# Altium PCB CSR8311_Core.PcbDoc
Units mil, origin at the board's own origin, x right, y up, seen from the top; angles counter-clockwise.
Board outline 1105 x 1105 mil, 2 copper layers (Top Layer, Bottom Layer), stack 50.044 mil thick; 31 components, 38 nets, 155 pads, 42 vias.
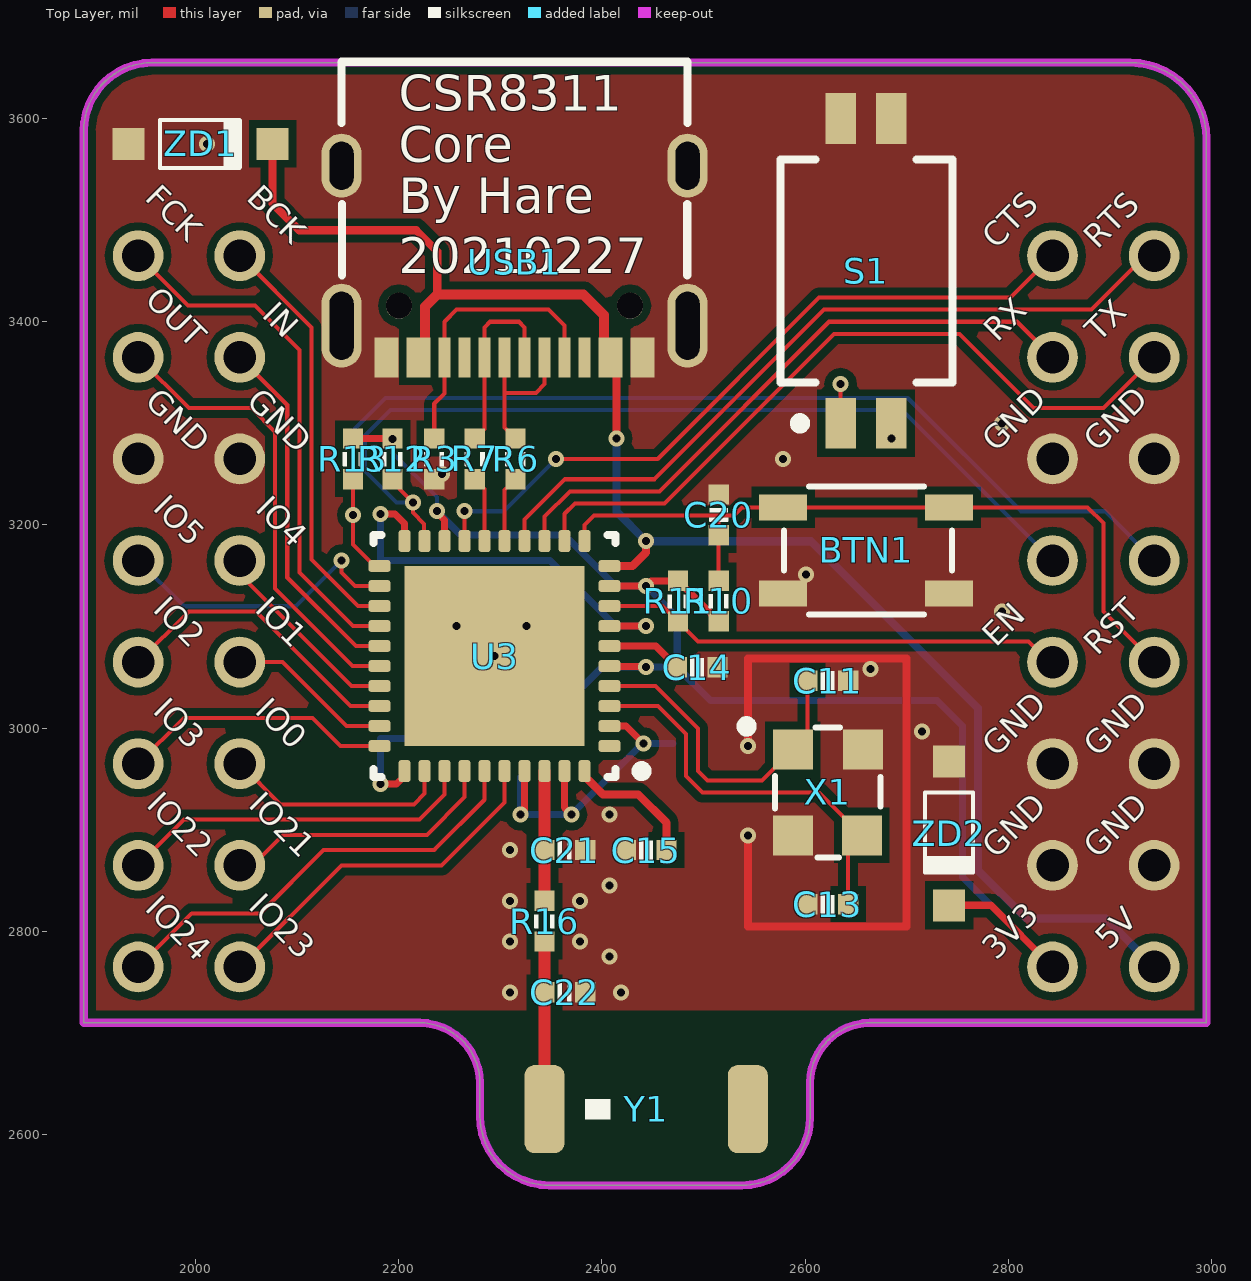
[diagram p0: Top Layer view]
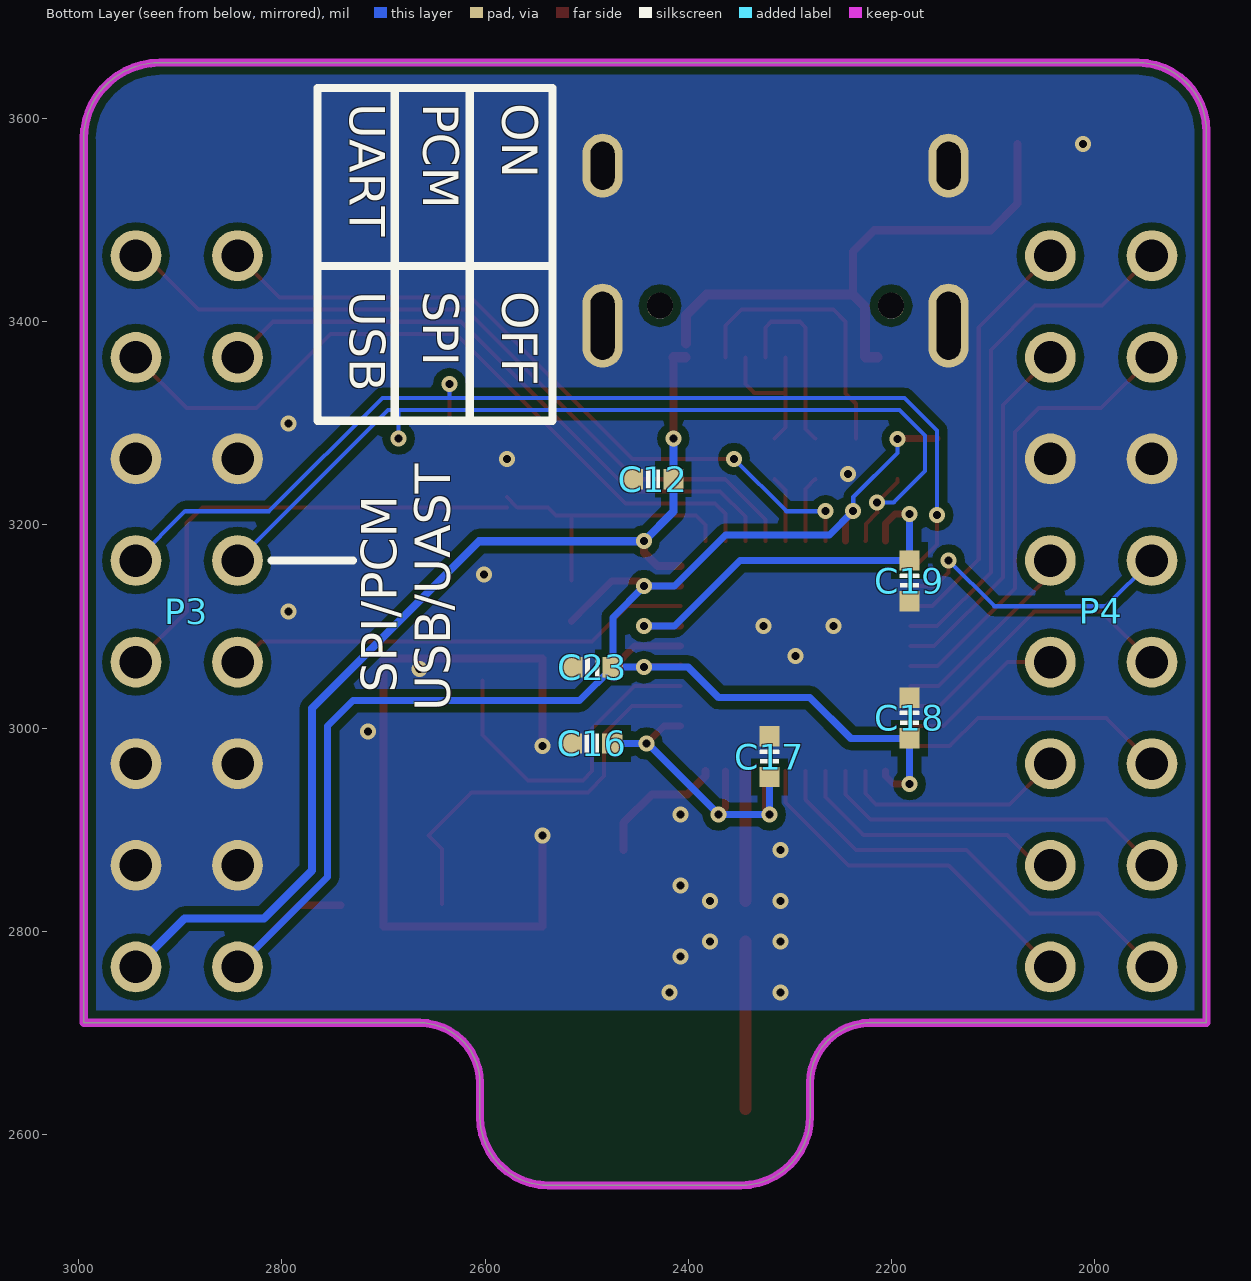
[diagram p1: Bottom Layer view, seen from below]
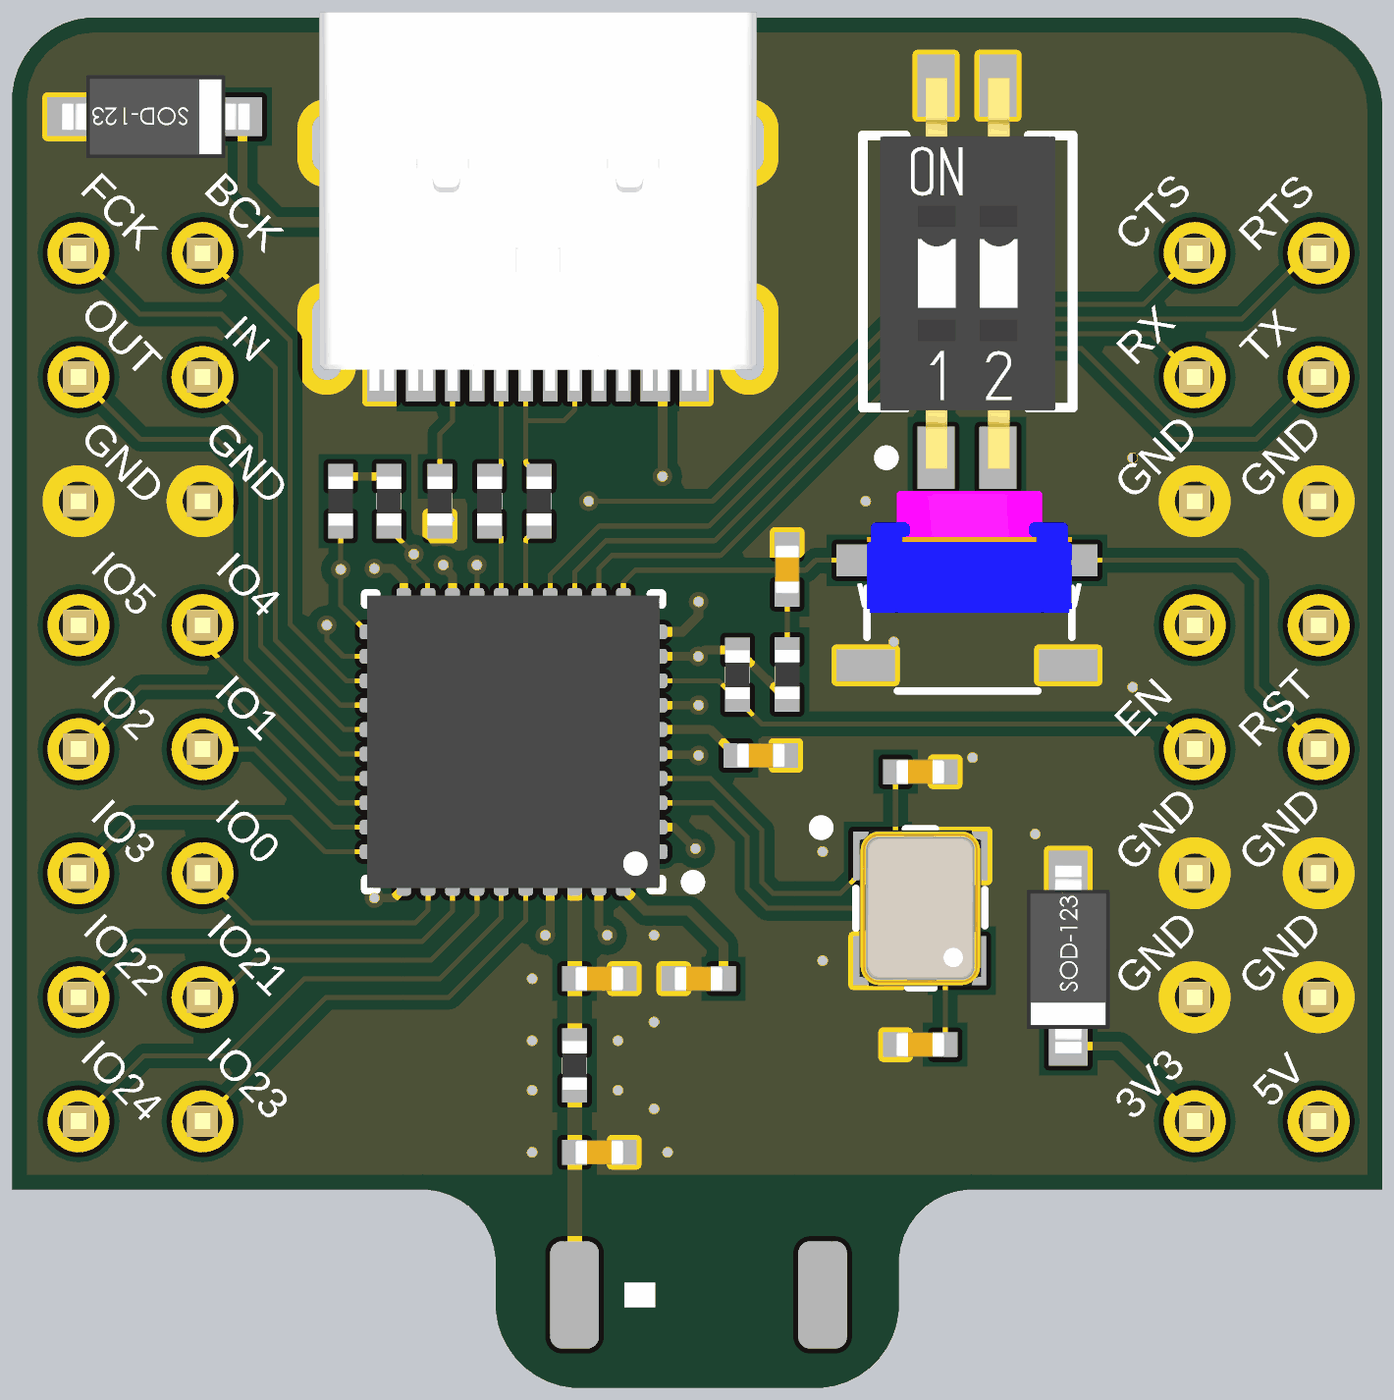
[diagram p2: 3D render of the assembled board from above, using the file's embedded part models]
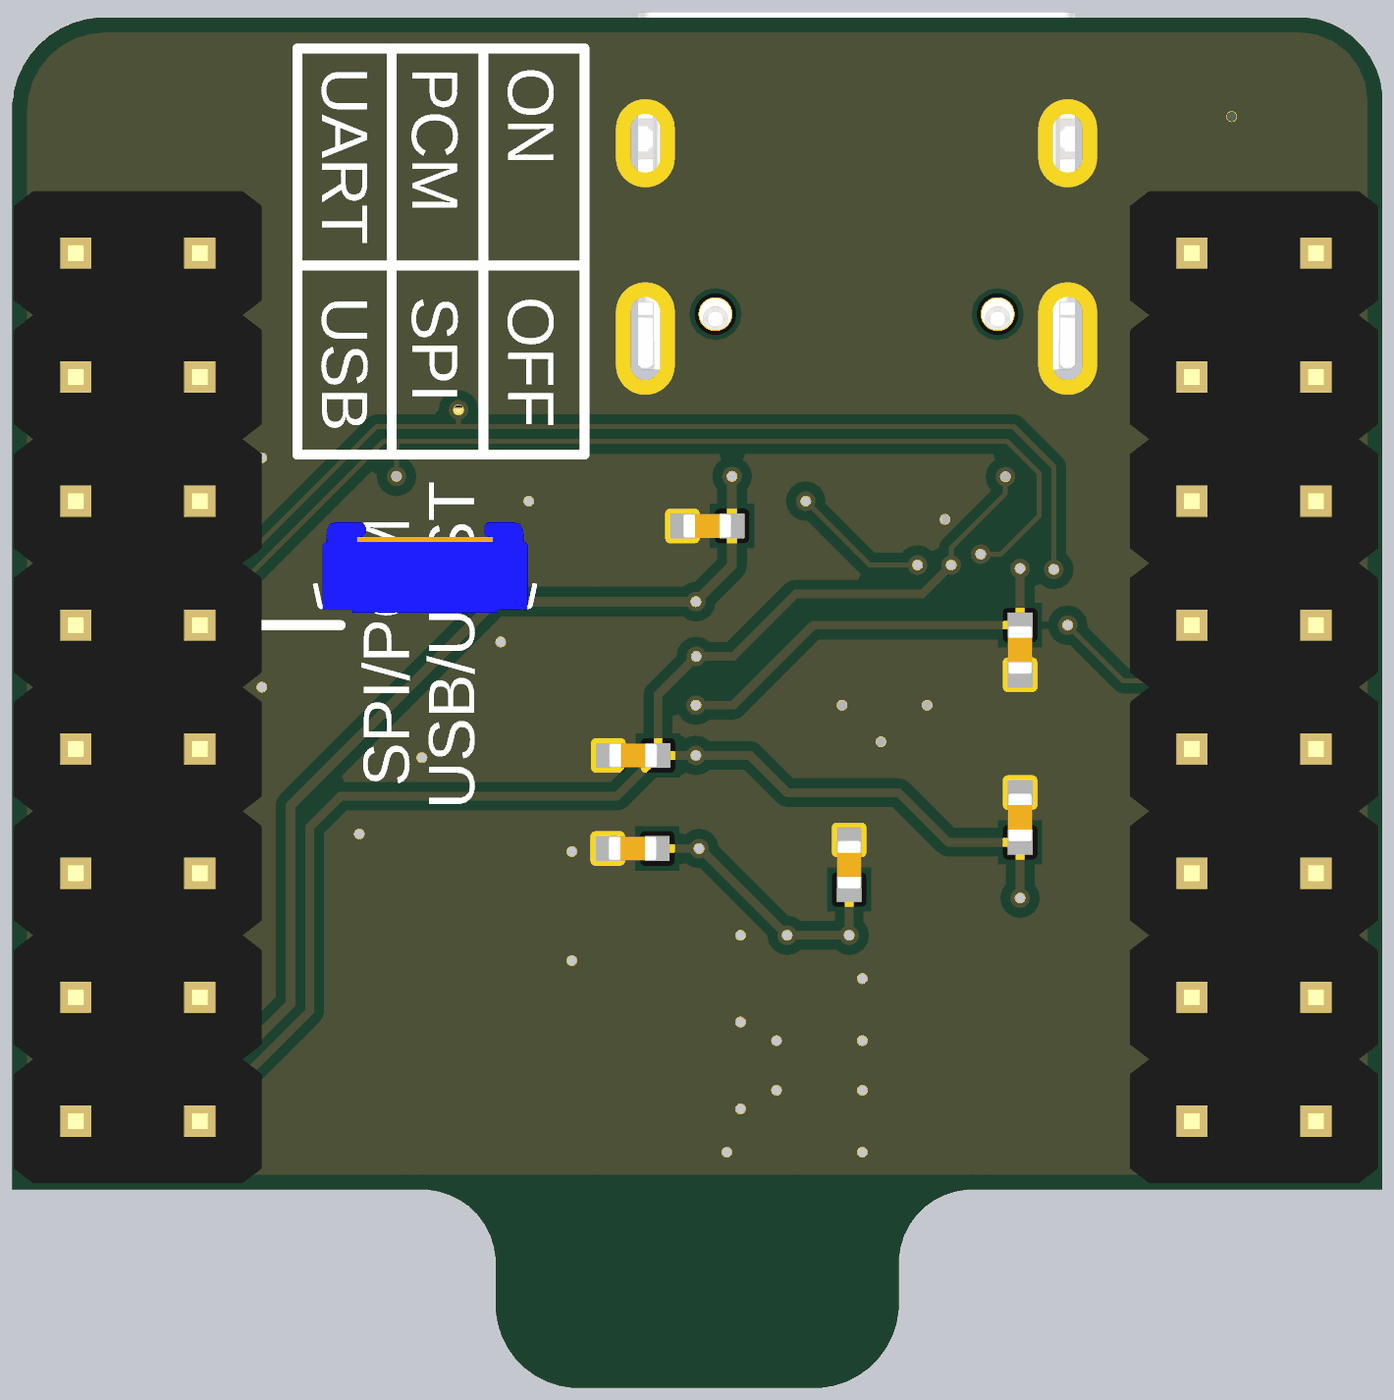
[diagram p3: 3D render of the assembled board from below, using the file's embedded part models]

## Layer stack, top to bottom
Top Solder: solder mask 0.4, Solder Resist, Dk 3.5
Top Layer: signal copper 1.4
Dielectric 1: dielectric 47.2441, FR-4, Dk 4.8
Bottom Layer: signal copper 1.4
Bottom Solder: solder mask 0.4, Solder Resist, Dk 3.5

## Board outline
2220.5,2710 cw(c2220.5,2650.51) 2280,2650.51 2280,2618.28 ccw(c2348.28,2618.28) 2348.28,2550 2537.61,2550 ccw(c2537.61,2617.39) 2605,2617.39 2605,2650.5 cw(c2664.5,2650.5) 2664.5,2710 2995,2710 2995,3580 ccw(c2920,3580) 2920,3655 1957.39,3655 ccw(c1957.39,3587.61) 1890,3587.61 1890,2710

## Design rules (kind name [scope] priority, off if disabled: settings)
Clearance [All] p1: gap=7.87 ignorepadtopadclearanceinfootprint=TRUE
ComponentClearance [All] p1: gap=0 collisioncheckmode=3 verticalgap=0 showdistances=FALSE
DiffPairsRouting [All] p1: maxlimit=10 minlimit=10 mostfreqgap=10 toplayer_minwidth=7.87 toplayer_maxwidth=15 toplayer_prefwidth=7.87 bottomlayer_minwidth=7.87 bottomlayer_maxwidth=15 bottomlayer_prefwidth=7.87 maxuncoupledlength=500
MatchedLengths SD_CARD_MatchedLengths [InNetClass('SD_CARD')] p1: tolerance=400 checknetsindiffpair=FALSE checkdiffpairvsdiffpair=TRUE checkxsignals=TRUE checkothers=TRUE
PolygonConnect PolygonConnect_wifi [HasFootprint('RTL8723DU_MOUDLE')] p1: connectstyle=Relief reliefconductorwidth=10 reliefentries=4 polygonreliefangle="90 Angle" airgapwidth=10
PolygonConnect PolygonConnect_Res [HasFootprint('RES_0603')] p2: connectstyle=Relief reliefconductorwidth=10 reliefentries=4 polygonreliefangle="90 Angle" airgapwidth=10
PolygonConnect PolygonConnect_Core [HasFootprint('CORE-82PIN-SMD')] p3: connectstyle=Relief reliefconductorwidth=10 reliefentries=4 polygonreliefangle="90 Angle" airgapwidth=10
PolygonConnect [All] p4: connectstyle=Direct reliefconductorwidth=10 reliefentries=4 polygonreliefangle="90 Angle" airgapwidth=10
RoutingVias [All] p1: holewidth=28 width=50 viastyle="Through Hole" minholewidth=7.87 minwidth=15.75 maxholewidth=28 maxwidth=50
SolderMaskExpansion [All] p1: expansion=4
Width Width_PWR [InNetClass('PWR')] p1: maxlimit=23.62 minlimit=7.87 preferedwidth=10
Width [All] p2: maxlimit=23.62 minlimit=4 preferedwidth=8
28 further rules are at their usual default settings.

## Components (designator, comment, footprint, x,y, rotation, side; value= is the part's Value field where it differs from the comment)
BTN1 "Button" BTN-4P-4.2*3.4*2.5 2660,3175 r180 top
C11 "10pF" CAP_0402 2622.41,3046.76 r180 top
C12 "2.2uF" CAP_0402 2434.45,3245 r0 bottom
C13 "10pF" CAP_0402 2622.41,2826.76 r0 top
C14 "2.2uF" CAP_0402 2493.85,3060 r180 top
C15 "470nF" CAP_0402 2443.59,2880 r180 top
C16 "15pF" CAP_0402 2494.69,2984.98 r0 bottom
C17 "2.2uF" CAP_0402 2320,2971.88 r90 bottom
C18 "0.1uF" CAP_0402 2182.17,3010 r270 bottom
C19 "2.2uF" CAP_0402 2182.17,3145 r270 bottom
C20 "0.1uF" CAP_0402 2515,3210 r90 top
C21 "NC" CAP_0402 2363.59,2880 r180 top locked
C22 "NC" CAP_0402 2363.59,2740 r180 top locked
C23 "2.2uF" CAP_0402 2494.17,3060 r0 bottom
P3 "DIP 2x8" HDR2X8_2.54_180 2943.59,3465 r180 bottom locked
P4 "DIP 2x8" HDR2X8_2.54_180 2043.59,3465 r180 bottom locked
R3 "5.1K" RES_0402 2235,3265 r90 top
R6 "22R" RES_0402 2315,3265 r90 top
R7 "22R" RES_0402 2275,3265 r90 top
R10 "10K" RES_0402 2515,3125.19 r90 top
R11 "10K" RES_0402 2475,3125 r270 top
R12 "10K" RES_0402 2193.98,3265 r270 top
R13 "10K" RES_0402 2155,3265 r270 top
R16 "0R" RES_0402 2343.59,2810 r270 top locked
S1 "SW-2P" SW-SMD-2-1.27 2660.59,3448.63 r90 top
U3 "CSR8311A08" QFN-40-P0.5 2295.37,3071.98 r90 top locked
USB1 "Type-C" USB-Type-C 2314.06,3459.29 r90 top locked
X1 "M26000J134" XTAL_3225-4 2622.41,2936.76 r270 top
Y1 "AN2051-245" ANT_2.4G_5.1X2.0 2443.59,2625 r0 top locked
ZD1 "BZT52C5V1S" SOD-123 2005,3575 r180 top
ZD2 "BZT52C3V9S" SOD-123 2741.69,2896.5 r90 top

## Footprints (in the part's own frame and the unit in brackets; to place one, negate y for a bottom-side part, rotate by r counter-clockwise, add the part's x,y. Pads: shape width x height; smd on the part's side, far side on the other; paste and mask are expansions set on the pad)
ANT_2.4G_5.1X2.0 [mm]
  rrect50% 1x2.2 smd: 1(-2.54,0) 2(2.54,0)
  silkscreen extent -1.52,-0.25 -0.89,0.25
BTN-4P-4.2*3.4*2.5 [mm] "SKRPABE010"
  rect 1.2x0.65 smd: 1(-2.075,1.075) 1(2.075,1.075) 2(-2.075,-1.075) 2(2.075,-1.075)
  silkscreen extent -2.15,-1.6 2.05,1.6, body extent -2.35,-1.6 2.25,1.6, height 2.5
CAP_0402 [mil]
  rect 20x20 smd: 1(-20,0) 2(20,0)
  silkscreen extent -7,-9 7,9, body extent -20,-10 20,10, height 20
HDR2X8_2.54_180 [mil]
  round 50 hole 32: 1(0,0) 2(100,0) 3(0,-100) 4(100,-100) 5(0,-200) 6(100,-200) 7(0,-300) 8(100,-300) 9(0,-400) 10(100,-400) 11(0,-500) 12(100,-500) 13(0,-600) 14(100,-600) 15(0,-700) 16(100,-700)
  body extent -50,-750 150,50, height 335
QFN-40-P0.5 [mm] "PQFN, 40-Leads, Body 5.98x5.98mm, Pitch 0.50mm, Thermal Pad 4.62x4.62mm, IPC Medium Density"
  rrect50% 0.3x0.55 smd: 1(-2.275,-2.851) 2(-1.775,-2.851) 3(-1.275,-2.851) 4(-0.775,-2.851) 5(-0.275,-2.851) 6(0.225,-2.851) 7(0.725,-2.851) 8(1.225,-2.851) 9(1.725,-2.851) 10(2.225,-2.851) 21(2.225,2.902) 22(1.725,2.902) 23(1.225,2.902) 24(0.725,2.902) 25(0.225,2.902) 26(-0.275,2.902) 27(-0.775,2.902) 28(-1.275,2.902) 29(-1.775,2.902) 30(-2.275,2.902)
  rrect50% 0.55x0.3 smd: 11(2.851,-2.225) 12(2.851,-1.725) 13(2.851,-1.225) 14(2.851,-0.725) 15(2.851,-0.225) 16(2.851,0.275) 17(2.851,0.775) 18(2.851,1.275) 19(2.851,1.775) 20(2.851,2.275) 31(-2.902,2.275) 32(-2.902,1.775) 33(-2.902,1.275) 34(-2.902,0.775) 35(-2.902,0.275) 36(-2.902,-0.225) 37(-2.902,-0.725) 38(-2.902,-1.225) 39(-2.902,-1.725) 40(-2.902,-2.225)
  rect 4.5x4.5 smd: 41(-0.025,0.025)
  silkscreen extent -3.05,-3.77 3,3.05, body extent -3.03,-2.97 2.97,3.03, height 0.9
RES_0402 [mil]
  rect 20x20 smd: 1(-20,0) 2(20,0)
  silkscreen extent -7,-10 7,10, body extent -20,-10 20,10, height 14
SOD-123 [mm]
  rect 0.8x0.8 smd: 1(1.8,0) 2(-1.8,0)
  silkscreen extent -1.02,-0.6 1.02,0.6, body extent -1.95,-0.85 1.9,0.85, height 1.42
SW-SMD-2-1.27 [mm]
  rect 1.27x0.76 smd: 1(-3.775,0.65) 2(-3.775,-0.62) 3(3.845,-0.62) 4(3.845,0.65)
  silkscreen extent -3.9,-2.15 2.82,2.15, body extent -4,-1.79 4,1.79, height 2.1
USB-Type-C [mm]
  round 0.65 hole 0.65: 0(-1.105,2.89) 0(-1.105,-2.89)
  oval 1.6x1 hole 0.6 slot 1.2 at 0 deg: 1(2.395,4.325) 2(2.395,-4.325)
  oval 2.1x1 hole 0.6 slot 1.7 at 0 deg: 3(-1.605,-4.325) 4(-1.605,4.325)
  rect 1x0.3 smd: A1(-2.395,-3.35) A4(-2.395,-2.55) A5(-2.395,-1.25) A6(-2.395,-0.25) A7(-2.395,0.25) A8(-2.395,1.25) A9(-2.395,2.55) A12(-2.395,3.35) B1(-2.395,3.05) B4(-2.395,2.25) B5(-2.395,1.75) B6(-2.395,0.75) B7(-2.395,-0.75) B8(-2.395,-1.75) B9(-2.395,-2.25) B12(-2.395,-3.05)
  silkscreen extent -0.34,-4.33 4.99,4.33, body extent -2.67,-4.48 5.08,4.48, height 3.26
XTAL_3225-4 [mm]
  rect 1x1 smd: 1(-1.074,-0.874) 2(1.074,-0.874) 3(1.074,0.848) 4(-1.074,0.874)
  silkscreen extent -1.78,-2.16 1.63,1.32, body extent -1.6,-1.25 1.6,1.25, height 0.61

## Part data
C11 C12 C13 C14 C15 C16 C17 C18 C19 C20 C21 C22 C23: library part CAP, "Capacitor"
  C11 C13: Specification="COG 50V"
  C12 C14 C15 C17 C19 C20: Specification="X7R 50V"
  C16: Specification="COG 16V"
  C18 C21 C22 C23: Specification="X7R 16V"
P3 P4: library part HDR2x8, "Header", Type=2.54
R3 R6 R7 R10 R11 R12 R13 R16: library part RES, "Resistor", Specification=±1%
S1: "拨码开关2P"
U3: library part CSR8311, "Bluetooth v4.1 single-chip radio and baseband IC for automotive applications."
USB1: library part USB-Type-C
X1: library part XTAL-4P, Specification=26M
Y1: library part ANTENNA
ZD1 ZD2: library part Diode-ZD, "Zender Diode", Specification=200mW

## Via types
v1: diameter 15.75, hole 7.87, Top Layer to Bottom Layer, tented both sides, 42 vias

## Nets (pads, with @x,y where several pads share a name; then routed paths per layer and width w, separated by ;. In a path a pad name is that pad's centre, name@x,y a point inside that pad or via, vN(x,y) a via of type N, cw(c..) or ccw(c..) an arc to the next point about the centre after c; other vN are vias at no path point)
BT_NRST: BTN1.2 C20.1 P3.9 R10.2 U3.11 | length 765.8
  Top Layer w4: U3.11 2382.96,3199.91 2392.42,3209.38 2515,3209.38 ; R10.2 2515,3209.38 ; BTN1.2@2578.31,3217.32 2741.69,3217.32 2878.06,3217.32 2893.59,3201.79 2893.59,3115 P3.9 ; BTN1.2@2578.31,3227.32 2568.31,3217.32 2537.98,3217.32 2530.04,3209.38 2515,3209.38
BT_PCM2_CLK: P4.1 U3.23 | length 414.3
  Top Layer w4: P4.1 2114.08,3394.5 2114.08,3165.92 2159.81,3120.19 U3.23
BT_PCM2_IN: P4.3 U3.25 | length 354.8
  Top Layer w4: P4.3 2090.33,3318.25 2090.33,3148.38 2157.89,3080.82 U3.25
BT_PCM2_OUT: P4.4 U3.26 | length 453.7
  Top Layer w4: P4.4 1993.59,3315 2055,3315 2078.46,3291.54 2078.46,3137.33 2154.65,3061.13 U3.26
BT_PCM2_SYNC: P4.2 U3.24 | length 516.8
  Top Layer w4: P4.2 1992.8,3415.79 2058.77,3415.79 2102.21,3372.35 2102.21,3153.3 2155,3100.5 U3.24
BT_PIO0: P4.11 U3.32 | length 225
  Top Layer w4: P4.11 2083.59,2925 2215,2925 2225.48,2935.48 U3.32
BT_PIO1: P4.9 U3.29 | length 163.6
  Top Layer w4: P4.9 2085.85,3065 2148.77,3002.08 U3.29
BT_PIO2: P4.10 U3.28 | length 296.9
  Top Layer w4: P4.10 1993.59,3115 2059.4,3115 2152.64,3021.76 U3.28
BT_PIO3: P4.12 U3.30 | length 267.6
  Top Layer w4: P4.12 1988.59,3010 2115,3010 2142.61,2982.39 U3.30
BT_PIO4: P4.7 U3.27 | length 196.7
  Top Layer w4: P4.7 2045.08,3163.5 2045.08,3149.92 2153.55,3041.45 U3.27
BT_PIO5: P4.8 U3.22 | length 292.2
  Top Layer w4: v1(2143.78,3165) 2143.78,3153.01 2156.92,3139.87 U3.22
  Bottom Layer w4: P4.8 1988.59,3120 2098.78,3120 v1(2143.78,3165)
BT_PIO21: P4.13 U3.34 | length 274.7
  Top Layer w4: P4.13 2056.03,2865 2086.03,2895 2227.72,2895 2264.85,2932.12 U3.34
BT_PIO22: P4.14 U3.33 | length 353.5
  Top Layer w4: P4.14 1988.59,2910 2220.46,2910 2245.16,2934.7 U3.33
BT_PIO23: P4.15 U3.36 | length 358.5
  Top Layer w4: P4.15 2143.59,2865 2242.27,2865 2304.22,2926.95 U3.36
BT_PIO24: P4.16 U3.35 | length 437.3
  Top Layer w4: P4.16 1996.31,2817.72 2063.76,2817.72 2126.03,2880 2235,2880 2284.53,2929.53 U3.35
BT_RF: C21.2 R16.1 U3.38 | length 127.7
  Top Layer w11.81: R16.1 C21.2 U3.38
BT_SPI_PCM: P3.7 R13.2 S1.1 U3.21 | length 1102.3
  Top Layer w4: R13.2 v1(2155,3210) 2155,3180.76 2176.2,3159.56 U3.21 ; S1.1 v1(2635,3338.59)
  Bottom Layer w4: v1(2155,3210) 2155,3292.75 2187.25,3325 2635,3325 ; v1(2635,3338.59) 2635,3325 ; P3.7 2895.08,3213.5 2812.56,3213.5 2701.06,3325 2635,3325
BT_UART_CTS: P3.2 U3.17 | length 712.2
  Top Layer w4: U3.17 v1(2264.85,3213.5) ; v1(2355,3265) 2455,3265 2613.75,3423.75 2802.33,3423.75 P3.2
  Bottom Layer w4: v1(2264.85,3213.5) 2303.5,3213.5 v1(2355,3265)
BT_UART_RTS: P3.1 U3.14 | length 748.3
  Top Layer w4: U3.14 2323.9,3205.23 2363.67,3245 2451.79,3245 2618.67,3411.87 2881.87,3411.87 2935,3465 P3.1
BT_UART_RX: P3.4 U3.13 | length 617.9
  Top Layer w4: U3.13 2343.59,3208.13 2368.59,3233.13 2456.71,3233.13 2623.58,3400 2808.59,3400 P3.4
BT_UART_TX: P3.3 U3.12 | length 731.5
  Top Layer w4: U3.12 2363.27,3211.02 2373.5,3221.25 2461.63,3221.25 2628.5,3388.13 2751.87,3388.13 2825,3315 2893.59,3315 P3.3
BT_USB_D_N: R6.1 U3.15 | length 65.2
  Top Layer w4: U3.15 2304.22,3234.22 R6.1
BT_USB_D_P: R7.1 U3.16 | length 64.7
  Top Layer w4: R7.1 2284.53,3235.47 U3.16
BT_USB_UART: P3.8 R12.2 S1.2 U3.19 | length 945.1
  Top Layer w4: R12.2 2193.98,3242.32 v1(2213.98,3222.27) v1(2213.98,3222.27) 2213.98,3212.15 2225.07,3201.06 2225.07,3184.63 U3.19
  Bottom Layer w4: v1(2213.98,3222.27) 2197.73,3222.27 2166.87,3253.13 2166.87,3287.83 2192.17,3313.13 2685,3313.13 ; v1(2685,3285) 2685,3313.13 ; P3.8 2695.46,3313.13 2685,3313.13
BT_VREG_EN: P3.10 R11.2 U3.8 | length 458.8
  Top Layer w4: U3.8 2459.81,3120.19 R11.2 2494.69,3085.31 2820.06,3085.31 2840.38,3065 P3.10
GND: BTN1.1 C11.1 C12.2 C13.1 C14.1 C15.2 C16.2 C17.2 C18.1 C19.2 C20.2 C21.1 C22.1 C23.2 P3.5 P3.6 P3.11 P3.12 P3.13 P3.14 P4.5 P4.6 R3.1 S1.3 S1.4 U3.41 USB1.1 USB1.2 USB1.3 USB1.4 USB1.A1 USB1.A12 USB1.B1 USB1.B12 X1.2 X1.4 ZD1.1 ZD2.1 | length 752.2
  Top Layer w7.87: v1(2543.59,2894.49) 2543.59,2804.95 2700,2804.95 2700,3068.57 2543.59,3068.57 v1(2543.59,2982.39)
  other v1: 2309.37,2740 2418.59,2740 2407.63,2775 2309.37,2790 2378.59,2790 2309.37,2830 2378.59,2830 2407.63,2845 2309.37,2880 2407.63,2915 2715,2996.64 2664.5,3058.18 2294.37,3070.98 2257.13,3100.5 2325.71,3100.5 2793.59,3115 2601,3151.47 2242.75,3250.31 2578.31,3265 2793.59,3300 2011.56,3575
NetC14_2: C14.2 U3.6 | length 74.9
  Top Layer w7: U3.6 2453.03,3080.82 C14.2
NetC15_1: C15.1 U3.40 | length 131.5
  Top Layer w8: U3.40 2382.96,2952.8 2401.01,2934.75 2435.79,2934.75 2463.59,2906.95 C15.1
NetC16_1: C16.1 C17.1 U3.2 U3.37 U3.39 | length 346.3
  Top Layer w7: v1(2320,2915) 2323.9,2918.9 U3.37 ; U3.39 2363.27,2921.73 v1(2370,2915) ; U3.2 2423.9,3002.08 v1(2441.06,2984.89)
  Bottom Layer w7: C17.1 v1(2320,2915) v1(2370,2915) 2439.91,2984.91 v1(2441.06,2984.89) 2441.15,2984.98 C16.1@2469.98,2984.98
NetC19_1: C19.1 U3.7 U3.20 | length 414.4
  Top Layer w7: v1(2182.17,3210.68) 2196.54,3210.68 2205.79,3201.42 U3.20 ; U3.7 v1(2443.59,3100.5)
  Bottom Layer w7: v1(2182.17,3210.68) C19.1 2348.97,3165 2413.47,3100.5 v1(2443.59,3100.5)
NetC22_2: C22.2 R16.2 Y1.1 | length 165
  Top Layer w11.81: Y1.1 C22.2 R16.2
NetR3_2: R3.2 USB1.A5 USB1.B5 | length 279.9
  Top Layer w4: R3.2 2235,3319.29 2245.16,3329.45 USB1.B5 2245.16,3400 2257.03,3411.87 2347.5,3411.87 2363.27,3396.1 USB1.A5
USB_D_N: R6.2 USB1.A7 USB1.B7 | length 154
  Top Layer w4: USB1.A7 2304.22,3330.39 ; R6.2 2304.22,3295.78 2304.22,3330.39 ; USB1.B7 2343.59,3338.59 2335,3330 2304.61,3330 2304.22,3330.39
USB_D_P: R7.2 USB1.A6 USB1.B6 | length 186.9
  Top Layer w4: R7.2 2284.53,3294.53 USB1.B6 2284.53,3394.53 2290,3400 2318.43,3400 2323.9,3394.53 USB1.A6
VCC_3V3: C18.2 C23.1 P3.16 R10.1 R11.1 R12.1 R13.1 U3.5 U3.9 U3.18 U3.31 ZD2.2 | length 1756.5
  Top Layer w7: R13.1 R12.1 ; v1(2182.17,2945) 2197.99,2945 2205.79,2952.8 U3.31 ; v1(2237.72,3213.5) 2237.72,3212.37 2245.16,3204.93 U3.18 ; U3.5 2408.19,3060.57 2443.02,3060.57 v1(2443.59,3060) ; U3.9 v1(2443.31,3139.87) 2448.44,3145 R11.1 2498.41,3121.59 2498.6,3121.59 R10.1 ; ZD2.2 2782.95,2825.63 P3.16
  Bottom Layer w4: v1(2193.98,3284.69) 2194.14,3284.53 2194.14,3270.81 2237.57,3227.38 2237.57,3216.7 v1@2236.05,3215.18
  Bottom Layer w7: v1(2182.17,2945) C18.2 2240,2990 2280,3030 2370,3030 2400,3060 v1(2443.59,3060) C23.1 ; v1@2236.05,3215.18 v1(2237.72,3213.5) 2237.72,3213.4 2261.06,3190.07 2363.27,3190.07 2413.47,3139.87 v1(2443.31,3139.87) 2474.17,3109.02 C23.1 ; P3.16 2755,2853.59 2755,3002.15 2730.01,3027.13 2507.04,3027.13 C23.1
VCC_5V: C12.1 P3.15 U3.10 USB1.A4 USB1.A9 USB1.B4 USB1.B9 ZD1.2 | length 1586.3
  Top Layer w8: ZD1.2 2075.87,3516.34 2102.21,3490 2217.27,3490 2238,3469.27 2238,3426.75 ; U3.10 2430.24,3159.56 2443.59,3172.9 v1(2443.59,3183.98) ; v1(2414.45,3285) USB1.A4
  Top Layer w10: USB1.A9 USB1.B4 2225.95,3365.47 2225.95,3414.7 2238,3426.75 2381.84,3426.75 2402.17,3406.42 USB1.B9@2402.17,3378.78 ; USB1.B9 USB1.A4
  Bottom Layer w8: v1(2414.45,3285) C12.1 2414.45,3213.12 v1(2443.59,3183.98) 2606.02,3183.98 2770.37,3019.63 2770.37,2859.95 2817.66,2812.66 2895.92,2812.66 P3.15
XTAL26_IN: C11.2 U3.4 X1.1 | length 329.7
  Top Layer w4: U3.4 2452.89,3041.45 2494.69,2999.65 2494.69,2957.72 2503.77,2948.64 2557.61,2948.64 X1.1 2602.41,2993.44 C11.2
XTAL26_OUT: C13.2 U3.3 X1.3 | length 398.5
  Top Layer w4: U3.3 2455.31,3021.76 2482.81,2994.27 2482.81,2952.81 2498.85,2936.76 2613.54,2936.76 X1.3 2642.41,2881.09 C13.2
pads on no net: U3.1 USB1.0 USB1.A8 USB1.B8 Y1.2

## Polygon pours and split planes (outlines as drawn)
GND on Top Layer "NONET_L-01_P-001" (solid, remove dead copper, pour order 8): 1890,3675 2995,3675 2995,2720 1890,2720
no net on Top Layer "NONET_L01_P000" (solid, remove dead copper, pour order 0): -1090.59,-350.01
GND on Bottom Layer "NONET_L-01_P-001" (solid, remove dead copper, pour order 10): 1890,2720 2995,2720 2995,3685 1890,3685

## Keep-outs
Keep-Out Layer:
  the board outline again, w8

## Other copper
Top Layer:
  pour cut-out: 2192.17,3180 2196.73,3175.44 2403.6,3175.44 2403.6,2970.51 2389.08,2955.99 2193.77,2955.99
  pour cut-out: 2195,2720 2197.13,2722.13 2678.86,2722.13 2678.86,2534.52 2683.37,2530 2668.37,2515 2192.21,2515
Bottom Layer:
  pour cut-out: 2195.75,2722.13 2677.79,2722.13 2677.79,2522.5 2255.04,2522.5

## Silkscreen, mask and mechanical layers (free items; w line width, h text height)
Top Overlay:
  text "CSR8311" at 2199.98,3595.77 h60
  text "Core" at 2199.98,3545 h60
  text "FCK" at 1943.59,3515 h39.37 r315
  text "BCK" at 2043.39,3515 h39.37 r315
  text "By Hare" at 2199.98,3495 h60
  text "CTS" at 2793.58,3465 h39.37 r45
  text "RTS" at 2893.58,3465 h39.37 r45
  text "20210227" at 2199.98,3435.77 h60
  text "OUT" at 1943.59,3415 h39.37 r315
  text "IN" at 2058.77,3400 h39.37 r315
  text "RX" at 2795.19,3373.24 h39.37 r45
  text "TX" at 2895.19,3373.24 h39.37 r45
  text "GND" at 1943.59,3315 h39.37 r315
  text "GND" at 2043.59,3315 h39.37 r315
  text "GND" at 2793.58,3265 h39.37 r45
  text "GND" at 2893.58,3265 h39.37 r45
  text "IO5" at 1951.79,3210 h39.37 r315
  text "IO4" at 2052.54,3209.25 h39.37 r315
  text "IO2" at 1951.79,3110 h39.37 r315
  text "IO1" at 2051.79,3110 h39.37 r315
  text "EN" at 2793.59,3073.24 h39.37 r45
  text "RST" at 2893.58,3065 h39.37 r45
  text "IO3" at 1951.79,3010 h39.37 r315
  text "IO0" at 2051.79,3010 h39.37 r315
  text "GND" at 2793.58,2965 h39.37 r45
  text "GND" at 2893.58,2965 h39.37 r45
  text "IO22" at 1945.35,2917.72 h39.37 r315
  text "IO21" at 2045.35,2917.72 h39.37 r315
  text "GND" at 2793.58,2865 h39.37 r45
  text "GND" at 2893.58,2865 h39.37 r45
  text "IO23" at 2045.35,2817.72 h39.37 r315
  text "IO24" at 1943.59,2816 h39.37 r315
  text "5V" at 2905,2775 h39.37 r45
  text "3V3" at 2793.59,2765 h39.37 r45
Bottom Overlay:
  lines w8: 2535,3455 2765,3455 ; 2615,3302.59 2615,3630 ; 2688.91,3302.59 2688.91,3630 ; 2730,3165 2810,3165 ; 2533.41,3302.59 2765,3302.59 2765,3630 2533.41,3630 2533.41,3302.59
  text "ON" at 2595,3615 h60 r90
  text "PCM" at 2672.41,3615 h60 r90
  text "UART" at 2745,3615 h60 r90
  text "OFF" at 2595,3430 h60 r90
  text "SPI" at 2672.41,3430 h60 r90
  text "USB" at 2745,3430 h60 r90
  text "SPI/PCM" at 2675,3035 h60 r270
  text "USB/UAST" at 2622.41,3016.76 h60 r270
Mechanical 1:
  the board outline again, w8
Top Component:
  lines w8: 2043.59,3165 2443.59,3165 ; 2443.59,4481.41 2443.59,3165 ; 2450.66,2305 2443.59,2312.07 2443.59,3165 ; 2843.59,3165 2443.59,3165